# Altium PCB Motordriver.PcbDoc
Units mm, origin at the board's own origin, x right, y up, seen from the top; angles counter-clockwise.
Board outline 106.05 x 50.93 mm, 2 copper layers (Top Layer, Bottom Layer); 20 components, 13 nets, 109 pads, 0 vias.
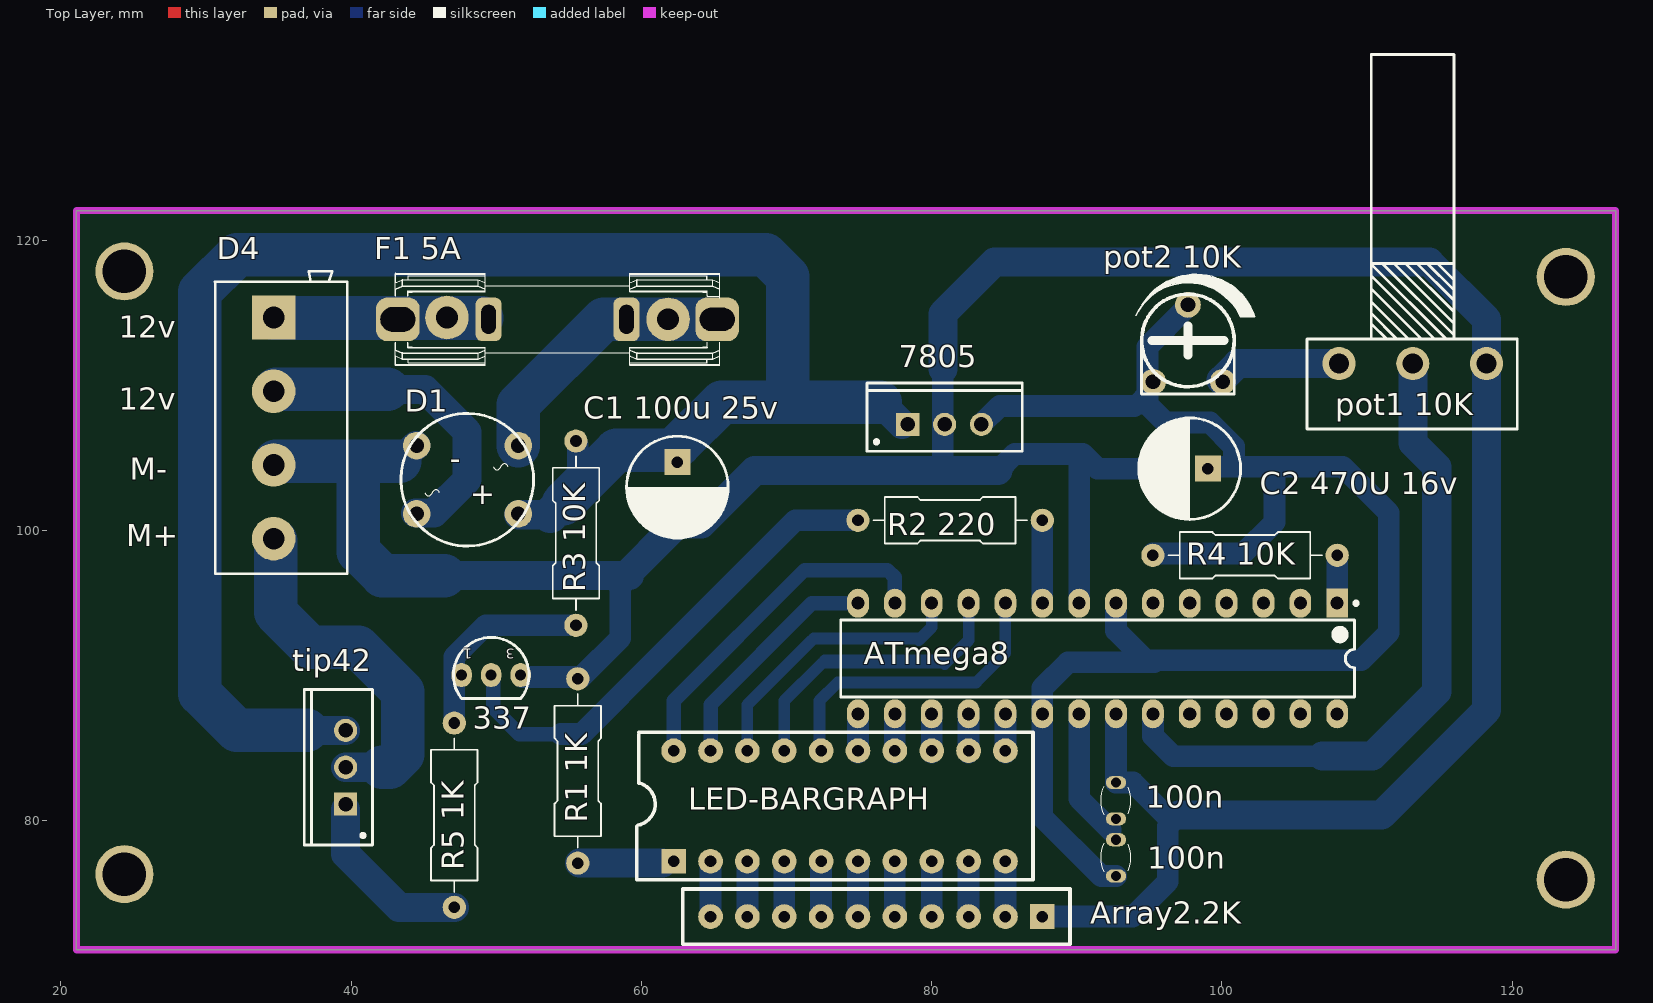
[diagram p0: Top Layer view]
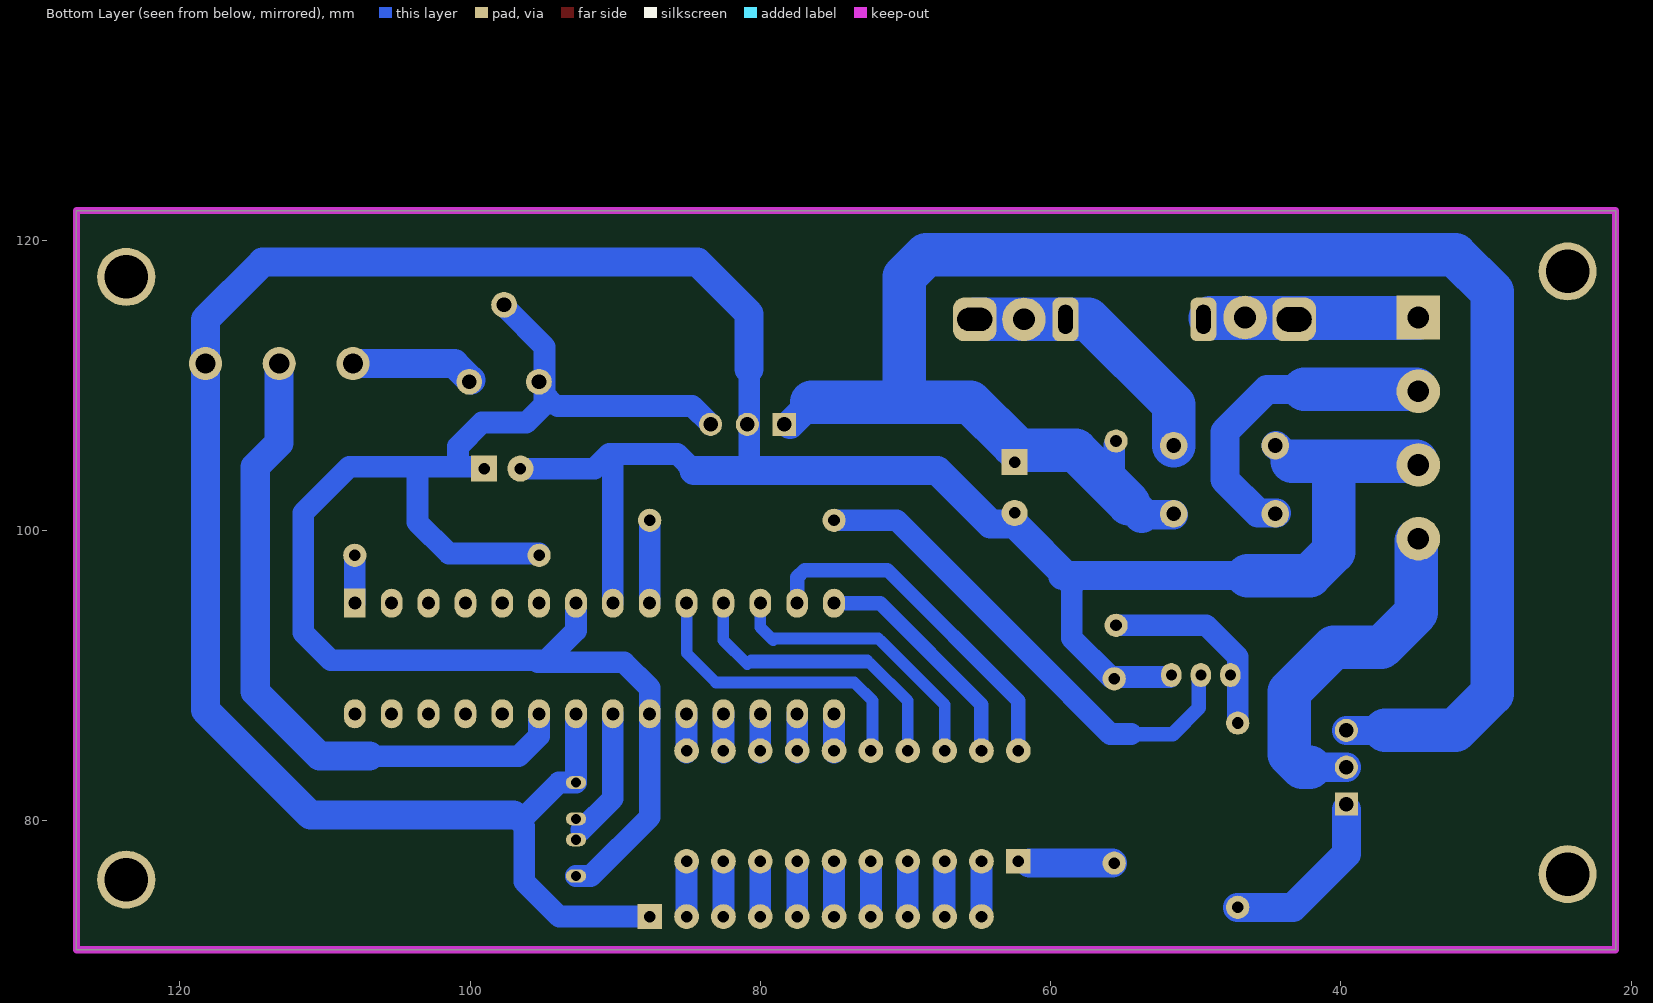
[diagram p1: Bottom Layer view, seen from below]

## Layer stack, top to bottom
Top Solder: solder mask 0.0102, Solder Resist, Dk 3.5
Top Layer: signal copper 0.0356
Dielectric 1: dielectric 0.32, FR-4, Dk 4.8
Bottom Layer: signal copper 0.0356
Bottom Solder: solder mask 0.0102, Solder Resist, Dk 3.5

## Board outline
21.082,71.12 21.082,122.047 127.127,122.047 127.127,71.12

## Design rules (kind name [scope] priority, off if disabled: settings)
Clearance [All] p1: gap=0.254 ignorepadtopadclearanceinfootprint=FALSE except(0: Arc-Hole Track-Hole SMDPad-Hole THPad-Hole Via-Hole Fill-Hole Poly-Hole Region-Hole Text-Hole)
PolygonConnect [All] p1: connectstyle=Relief reliefconductorwidth=0.254 reliefentries=4 polygonreliefangle="90 Angle" airgapwidth=0.254
RoutingVias [All] p1: holewidth=0.711 width=1.27 viastyle="Through Hole" minholewidth=0.711 minwidth=1.27 maxholewidth=0.711 maxwidth=1.27
SolderMaskExpansion [All] p1: expansion=0.102
Width [All] p1: maxlimit=3 minlimit=0.254 preferedwidth=1 toplayer_maxwidth=0.254 toplayer_prefwidth=0.254 bottomlayer_minwidth=0.3 minimp=50.000000 maximp=50.000000 favimp=50.000000
30 further rules are at their usual default settings.

## Components (designator, comment, footprint, x,y, rotation, side; value= is the part's Value field where it differs from the comment)
100n "100nF" "CAP Ceramic 2.5MM" 92.71,80.137 r90 top (schematic designator C3)
100n "100nF" "CAP Ceramic 2.5MM" 92.71,76.2 r90 top (schematic designator C4)
337 "Comment" 78LXX 49.657,90.043 r180 top
7805 "L7805CV" "TO-220 AB WITH HEAT SINK" 80.899,107.315 r0 top
Array2.2K "Comment" Array 87.63,73.406 r180 top
ATmega8 "ATmega8A-PU" 28P3 91.44,91.186 r270 top (schematic designator U1)
"C1 100u 25v" "100uF25v" "Cap electrolitic radial 6x7-2.5"#1 62.484,102.997 r270 top (schematic designator C1)
"C2 470U 16v" "470uF16v" "Cap electrolitic radial 6x7-2.5"#2 97.79,104.267 r180 top (schematic designator C2)
D1 "Diode Bridge" "Bridge Circle Package" 48.006,103.505 r180 top
D4 "Comment" KF301-4PIN 34.671,114.681 r0 top
"F1 5A" "F=1.0 A" "Fuse 5x20 With holder pin" 54.229,114.554 r270 top (schematic designator F1)
LED-BARGRAPH "Comment" LED-BARGRAPH 62.23,77.216 r90 top
"pot1 10K" "10K" POT 118.237,111.506 r180 top (schematic designator POT1)
"pot2 10K" "Comment" "POT 4" 97.663,112.903 r0 top
"R1 1K" "10K" "Axial 0_5W 5_0mm" 55.626,83.439 r90 top (schematic designator R4)
"R2 220" "1K" "Axial 0_5W 5_0mm" 81.28,100.711 r180 top
"R3 10K" "1K" "Axial 0_5W 5_0mm" 55.499,99.822 r270 top (schematic designator R2)
"R4 10K" "1K" "Axial 0_5W 5_0mm" 101.6,98.298 r180 top (schematic designator R3)
"R5 1K" "10K" "Axial 0_5W 5_0mm" 47.117,80.391 r90 top
tip42 "TIP41C" "TO-220 AB WITH HEAT SINK" 39.624,83.693 r90 top (schematic designator BC337)

## Footprints (in the part's own frame and the unit in brackets; to place one, negate y for a bottom-side part, rotate by r counter-clockwise, add the part's x,y. Pads: shape width x height; smd on the part's side, far side on the other; paste and mask are expansions set on the pad)
28P3 [mm] "DIP, 28-Leads, Row Spacing 7.62mm, Pitch 2.54mm, Body 34.67x7.3mm"
  rect 2x1.5 hole 0.9: 1(-3.81,16.51)
  oval 2x1.5 hole 0.9: 2(-3.81,13.97) 3(-3.81,11.43) 4(-3.81,8.89) 5(-3.81,6.35) 6(-3.81,3.81) 7(-3.81,1.27) 8(-3.81,-1.27) 9(-3.81,-3.81) 10(-3.81,-6.35) 11(-3.81,-8.89) 12(-3.81,-11.43) 13(-3.81,-13.97) 14(-3.81,-16.51) 15(3.81,-16.51) 16(3.81,-13.97) 17(3.81,-11.43) 18(3.81,-8.89) 19(3.81,-6.35) 20(3.81,-3.81) 21(3.81,-1.27) 22(3.81,1.27) 23(3.81,3.81) 24(3.81,6.35) 25(3.81,8.89) 26(3.81,11.43) 27(3.81,13.97) 28(3.81,16.51)
  silkscreen extent -3.93,-17.7 2.65,17.94, body extent -3.95,-17.35 3.95,17.3, height 5.04
78LXX [mil]
  oval 55x65 hole 30: 1(80,0) 2(0,0) 3(-80,0)
  silkscreen extent -102,-102 102,63, body extent -97,-91 91,64, height 315
Array [mm]
  rect 1.7x1.7 hole 0.8: 0(0,0)
  round 1.7 hole 0.8: 1(2.54,0) 2(5.08,0) 3(7.62,0) 4(10.16,0) 5(12.7,0) 6(15.24,0) 7(17.78,0) 8(20.32,0) 9(22.86,0)
  silkscreen extent -1.91,-1.91 24.77,1.91
"Axial 0_5W 5_0mm" [mm] "Designer Abbas Basereh"
  round 1.6 hole 0.8: 1(6.35,0) 2(-6.35,0)
  silkscreen extent -5.3,-1.6 5.3,1.6, body extent -6.7,-1.65 6.7,1.65, height 4.02
"Bridge Circle Package" [mm] "Circle Bridge Rectifiers DESIGNER :Ali Hafizi"
  round 1.905 hole 1.016: 1(-3.518,2.35) 2(-3.518,-2.35) 3(3.482,-2.35) 4(3.482,2.35)
  silkscreen extent -4.57,-4.57 4.57,4.57, body extent -4.04,-4.07 4.06,4.03, height 5.21
"CAP Ceramic 2.5MM" [mm] "Bipolar Capacitor-Design:Ali Hafizi"
  oval 0.9x1.4 hole 0.7: 1(0,0) 2(2.5,0)
  silkscreen extent 0.28,-1.03 2.26,1.06
"Cap electrolitic radial 6x7-2.5"#1 [mm] "Cap electrolitic radial 6x7-2.5-Design:Abbas Basereh"
  rect 1.8x1.8 hole 0.8: 1(-1.721,0)
  round 1.8 hole 0.8: 2(1.779,0)
  silkscreen extent -3.5,-3.5 3.6,3.5, body extent -3,-3 3,3, height 7.3
"Cap electrolitic radial 6x7-2.5"#2 [mm] "Cap electrolitic radial 6x7-2.5-Design:Abbas Basereh"
  rect 1.8x1.8 hole 0.8: 1(-1.25,0)
  round 1.8 hole 0.8: 2(1.25,0)
  silkscreen extent -3.5,-3.5 3.6,3.5, body extent -3,-3 3,3, height 7.3
"Fuse 5x20 With holder pin" [mm] "Dsigner : Abbas Basereh"
  rrect50% 3x3 hole 1.6 slot 2.4 at 90 deg: 1(0,11)
  rrect50% 3x1.8 hole 1 slot 2 at 0 deg: 1(0,4.75) 2(0,-4.75)
  rrect50% 3x3 hole 1.7 slot 2.4 at 90 deg: 2(0,-11)
  silkscreen extent -3.18,-11.19 3.18,11.19, body extent -3.17,-11.69 3.17,11.69, height 8.63
KF301-4PIN [mm]
  rect 3x3 hole 1.5: 1(0,0)
  round 3 hole 1.5: 2(0,-5.08) 3(0,-10.16) 4(0,-15.24)
  silkscreen extent -4.06,-17.65 5.08,3.17, body extent -4.04,-17.65 5.03,3.25, height 12.52
LED-BARGRAPH [mm]
  rect 1.7x1.7 hole 0.8: 1(0,0)
  round 1.7 hole 0.8: 2(0,-2.54) 3(0,-5.08) 4(0,-7.62) 5(0,-10.16) 6(0,-12.7) 7(0,-15.24) 8(0,-17.78) 9(0,-20.32) 10(0,-22.86) 11(7.62,-22.86) 12(7.62,-20.32) 13(7.62,-17.78) 14(7.62,-15.24) 15(7.62,-12.7) 16(7.62,-10.16) 17(7.62,-7.62) 18(7.62,-5.08) 19(7.62,-2.54) 20(7.62,0)
  silkscreen extent -1.27,-24.77 8.89,2.54
POT [mil] "Voloume"
  round 90 hole 55: 1(0,0) 2(400,0) 3(200,0)
  silkscreen extent -83,-839 487,177, body extent -109,-1132 511,193, height 926
"POT 4" [mil] "Trimmer"
  round 70 hole 40: 1(-94.49,-104.33) 2(94.49,-104.33) 3(0,104.33)
  silkscreen extent -141,-138 181,187, body extent -125,-144 127,145, height 187
"TO-220 AB WITH HEAT SINK" [mm] "Epoxy meets UL94, V0-Design:Abbas Basereh"
  rect 1.6x1.6 hole 1: 1(-2.54,0)
  round 1.6 hole 1: 2(0,0) 3(2.54,0)
  silkscreen extent -5.35,-1.85 5.35,2.85, body extent -11.75,-4.6 11.75,11.3, height 25

## Part data
100n 100n: library part "CAP CERAMIC TOTAL SIZE", "CAP Ceramic Total", Designer="Ali Hafizi"
7805: library part "L7805CV-Linear Voltage Regulator", "Linear Voltage Regulator IC Positive FIXED Output 5V 1.5A TO-220AB", Manufacturer=STMicroelectronics, Designer="Abbas Basereh", Link=https://www.aliexpress.com/item/, Part. No=L7805CV
ATmega8: "8-bit AVR Microcontroller, 8KB Flash, 512 Bytes EEPROM, 1KB SRAM, 28-pin PDIP, Industrial Grade (-40°C to 85°C)", Supplier Part Number 1=ATMEGA8A-PU-ND, ComponentLink1Description="Manufacturer Link", ComponentLink1URL=http://www.atmel.com/products/avr/default.asp?, ComponentLink2Description="ATmega8A Datasheet", ComponentLink2URL=http://www.atmel.com/dyn/resources/prod_documents/doc8159.pdf, ComponentLink3Description="ATmega8A Summary", ComponentLink3URL=http://www.atmel.com/dyn/resources/prod_documents/8159S.pdf, ComponentLink4Description="Atmel.com Home", ComponentLink4URL=http://www.atmel.com, DatasheetVersion=2017-1-5, PackageDescription="28-lead (0.300\"/7.62mm Wide) Plastic Dual Inline Package (PDIP)", PackageReference=28P3, PackageVersion=2017-1-5, Published=2017-1-5, Publisher="Abbas Basereh", Supplier 1=Digi-Key, Supplier 2=Farnell, Supplier 3=Mouser, Supplier Part Number 2=1748534, Supplier Part Number 3=556-ATMEGA8A-PU
"C1 100u 25v" "C2 470U 16v": library part "Cap ELECTROLITIC TOTAL SIZE", "Cap electrolitic radial", Data=16-12-2016, Designer="Abbas Basereh"
D1: library part "Diode Bridge TOTAL SIZE", "Full Wave Diode Bridge", ComponentLink1Description=Datasheet, ComponentLink2Description=Reference, Design Date=1395/11/09, Designer="Abbas Basereh", Mounting Technology="Surface Mount\Through-Hole", Status=Unreleased
"F1 5A": library part "Fuse 5x20 with holdeer pins", "Fuses 5x20", Data=28-12-2016, Desc.="fuse with holder pins 5x20", Designer="Abbas Basereh"
"pot1 10K": library part POT, "Variable Resistor"
"R1 1K" "R2 220" "R3 10K" "R4 10K" "R5 1K": library part "RES Axial 0.5W", "RES Axial 0.5W", Data=4-1-2017, Desc.="RES Axial 0.5W", Designer="Abbas Basereh"
tip42: "NPN  power transistor", Manufacturer=STMicroelectronics, Desc.="Complementary power transistors", Designer="Abbas Basereh", Link=https://www.aliexpress.com/item/, Part. No=TIP41C

## Free pads (board coordinates)
  round 4 hole 3: 2(24.384,76.327) 2(24.384,117.856) 2(123.698,75.946) 2(123.698,117.475)
  round 3 hole 1.5: 3(46.609,114.681) 3(61.849,114.554)

## Nets (pads, with @x,y where several pads share a name; then routed paths per layer and width w, separated by ;. In a path a pad name is that pad's centre, name@x,y a point inside that pad or via, vN(x,y) a via of type N, cw(c..) or ccw(c..) an arc to the next point about the centre after c; other vN are vias at no path point)
+5: 
+12: 
ADC: 
GND: 
NetC3_1: 
NetD1_2: 
NetD1_3: 
NetF1_1: 
NetPOT1_2: 
NetQ1_1: 
NetR4_1: 
PWM: 
Vout: 
pads on no net: 100n.1 100n.2 337.1 337.2 337.3 7805.1 7805.2 7805.3 "C1 100u 25v.1" "C1 100u 25v.2" "C2 470U 16v.1" "C2 470U 16v.2" "F1 5A.1" "F1 5A.2" "pot1 10K.1" "pot1 10K.2" "pot1 10K.3" "pot2 10K.1" "pot2 10K.2" "pot2 10K.3" "R1 1K.1" "R1 1K.2" "R2 220.1" "R2 220.2" "R3 10K.1" "R3 10K.2" "R4 10K.1" "R4 10K.2" "R5 1K.1" "R5 1K.2" Array2.2K.0 Array2.2K.1 Array2.2K.2 Array2.2K.3 Array2.2K.4 Array2.2K.5 Array2.2K.6 Array2.2K.7 Array2.2K.8 Array2.2K.9 ATmega8.1 ATmega8.2 ATmega8.3 ATmega8.4 ATmega8.5 ATmega8.6 ATmega8.7 ATmega8.8 ATmega8.9 ATmega8.10 ATmega8.11 ATmega8.12 ATmega8.13 ATmega8.14 ATmega8.15 ATmega8.16 ATmega8.17 ATmega8.18 ATmega8.19 ATmega8.20 ATmega8.21 ATmega8.22 ATmega8.23 ATmega8.24 ATmega8.25 ATmega8.26 ATmega8.27 ATmega8.28 D1.1 D1.2 D1.3 D1.4 D4.1 D4.2 D4.3 D4.4 LED-BARGRAPH.1 LED-BARGRAPH.2 LED-BARGRAPH.3 LED-BARGRAPH.4 LED-BARGRAPH.5 LED-BARGRAPH.6 LED-BARGRAPH.7 LED-BARGRAPH.8 LED-BARGRAPH.9 LED-BARGRAPH.10 LED-BARGRAPH.11 LED-BARGRAPH.12 LED-BARGRAPH.13 LED-BARGRAPH.14 LED-BARGRAPH.15 LED-BARGRAPH.16 LED-BARGRAPH.17 LED-BARGRAPH.18 LED-BARGRAPH.19 LED-BARGRAPH.20 tip42.1 tip42.2 tip42.3
copper on no net: | length 953.8
  Bottom Layer w0.6: 62.23,84.709 62.23,88.265 71.374,97.409 76.835,97.409 77.47,96.774 77.47,94.996 ; 64.77,84.709 64.77,88.011 71.755,94.996 74.93,94.996 ; 67.31,84.709 67.31,88.011 71.882,92.583 ; 69.85,84.709 69.85,88.265 72.644,91.059 ; 72.39,84.709 72.39,88.519 73.406,89.535 83.058,89.535 85.09,91.567 85.09,94.996 ; 72.39,90.805 80.899,90.805 82.55,92.456 82.55,94.996 ; 79.248,92.583 80.01,93.345 ; 79.121,92.456 80.01,93.345 ; 79.121,92.456 71.755,92.456 79.121,92.456 ; 80.01,93.345 80.01,94.996 80.01,93.345
  Bottom Layer w0.8: 67.31,84.709 67.31,88.011 71.755,92.456 ; 69.85,84.709 69.85,88.265 72.39,90.805 ; 71.882,92.583 79.248,92.583 ; 72.263,84.455 72.263,88.265 73.533,89.535 83.058,89.535 85.09,91.567 85.09,94.996 ; 72.644,91.059 80.645,91.059 80.899,90.805 82.55,92.456 82.55,94.996 ; 79.121,92.456 80.01,93.345 80.01,94.996
  Bottom Layer w1: 49.784,90.043 49.784,87.789 51.594,85.979 54.451,85.979 ; 62.23,84.709 62.23,88.265 71.247,97.282 76.962,97.282 77.47,96.774 77.47,94.996 ; 64.77,84.709 64.77,88.011 71.755,94.996 74.93,94.996
  Bottom Layer w1.5: 47.117,86.741 47.117,91.313 49.276,93.472 55.499,93.472 ; 51.816,89.916 55.88,89.916 58.547,92.583 58.547,96.52 ; 54.451,85.979 55.88,85.979 61.341,91.44 70.612,100.711 74.93,100.711 ; 55.626,101.854 55.626,105.918 ; 64.77,73.406 64.77,77.089 ; 67.31,73.406 67.31,77.089 ; 69.85,73.406 69.85,77.089 ; 72.39,73.406 72.39,77.089 ; 74.93,73.406 74.93,77.089 ; 74.93,84.709 74.93,87.376 ; 77.47,73.406 77.47,77.089 ; 77.47,84.709 77.47,87.376 ; 80.01,73.406 80.01,77.089 ; 80.01,84.709 80.01,87.376 ; 80.772,104.267 80.772,111.125 ; 82.55,73.406 82.55,77.089 ; 82.55,84.709 82.55,87.376 ; 83.439,107.315 84.709,108.585 93.967,108.585 ; 84.582,104.14 85.725,105.283 90.424,105.283 91.44,104.267 96.54,104.267 ; 85.09,73.406 85.09,77.089 ; 85.09,84.709 85.09,87.376 ; 87.63,73.406 93.853,73.406 96.266,75.819 96.266,79.629 97.028,80.391 ; 87.63,94.996 87.63,100.711 ; 90.17,87.376 90.17,81.534 92.329,79.375 ; 90.17,94.996 90.17,105.283 ; 92.71,76.2 91.694,76.2 87.63,80.264 87.63,87.376 87.63,89.154 89.408,90.932 95.343,90.932 ; 92.71,82.637 93.893,82.637 96.139,80.391 ; 92.71,82.804 92.71,87.376 ; 92.71,94.996 92.71,93.091 94.742,91.059 109.601,91.059 111.506,92.964 111.506,101.219 108.331,104.394 99.04,104.394 ; 94.234,108.712 94.869,109.347 ; 95.25,87.503 95.25,85.852 96.647,84.455 100.076,84.455 106.934,84.455 ; 95.25,98.425 101.473,98.425 103.632,100.584 103.632,104.14 ; 97.663,115.443 94.869,112.649 94.869,108.712 96.139,107.442 99.187,107.442 100.838,105.791 100.838,104.648 ; 107.95,94.996 107.95,98.298 ; 113.157,111.506 113.411,111.76
  Bottom Layer w2: 34.48,104.457 34.798,104.775 ; 36.957,86.233 39.624,86.233 ; 39.624,80.772 39.624,77.724 43.307,74.041 47.117,74.041 ; 39.624,83.693 42.672,83.693 ; 42.513,109.728 45.085,109.728 48.006,106.807 48.006,103.505 45.72,101.219 44.45,101.219 ; 43.372,104.775 44.468,105.871 ; 46.419,96.901 54.927,96.901 59.182,96.901 ; 51.524,101.092 53.721,101.092 ; 55.753,77.089 61.468,77.089 ; 56.388,103.632 58.674,105.918 62.611,105.918 ; 58.547,96.52 62.484,100.457 64.135,100.457 67.818,104.14 84.582,104.14 ; 76.454,108.839 77.978,107.315 ; 80.772,111.125 80.772,114.935 84.328,118.491 114.3,118.491 118.237,114.554 118.237,87.63 110.998,80.391 97.028,80.391 ; 99.951,110.365 101.092,111.506 108.077,111.506 ; 106.934,84.455 110.363,84.455 114.808,88.9 114.808,104.394 113.157,106.045 113.157,111.506
  Bottom Layer w2.5: 53.721,101.092 54.483,101.854
  Bottom Layer w3: 34.671,114.648 49.022,114.648 ; 34.798,99.314 34.798,94.361 37.211,91.948 40.513,91.948 43.561,88.9 43.561,84.582 42.672,83.693 42.164,83.693 ; 34.798,104.775 43.372,104.775 ; 34.798,109.728 37.37,109.728 42.513,109.728 ; 36.957,86.233 34.163,86.233 32.131,86.233 29.591,88.773 29.591,116.459 32.131,118.999 68.58,118.999 70.104,117.475 70.104,109.093 ; 40.513,104.775 40.513,98.552 42.164,96.901 46.419,96.901 ; 51.524,105.855 51.524,108.674 57.404,114.554 64.516,114.554 ; 54.61,101.854 58.293,105.537 62.23,105.537 ; 58.979,114.554 65.229,114.554 ; 62.611,105.918 65.532,108.839 76.454,108.839

## Keep-outs
Keep-Out Layer:
  the board outline again, w0.5

## Silkscreen, mask and mechanical layers (free items; w line width, h text height)
Top Overlay:
  text "12v" at 24.003,113.284 h1.52
  text "12v" at 24.003,108.331 h1.52
  text "M-" at 24.765,103.505 h1.52
  text "M+" at 24.511,98.933 h1.52

## Text inside footprints (layer, text, board x,y; h text height)
337: Top Overlay "3" at 51.283,91.853 h0.7 r180; Top Overlay "1" at 48.362,91.853 h0.7 r180
D1: Top Overlay "+" at 49.946,103.095 h1.5 r180; Top Overlay "-" at 47.546,105.355 h1.5 r180